# Altium PCB Serial Com Module.PcbDoc
Units mm, origin at the board's own origin, x right, y up, seen from the top; angles counter-clockwise.
Board outline 32.25 x 24.3 mm, 2 copper layers (Top Layer, Bottom Layer); 10 components, 14 nets, 45 pads, 0 vias.
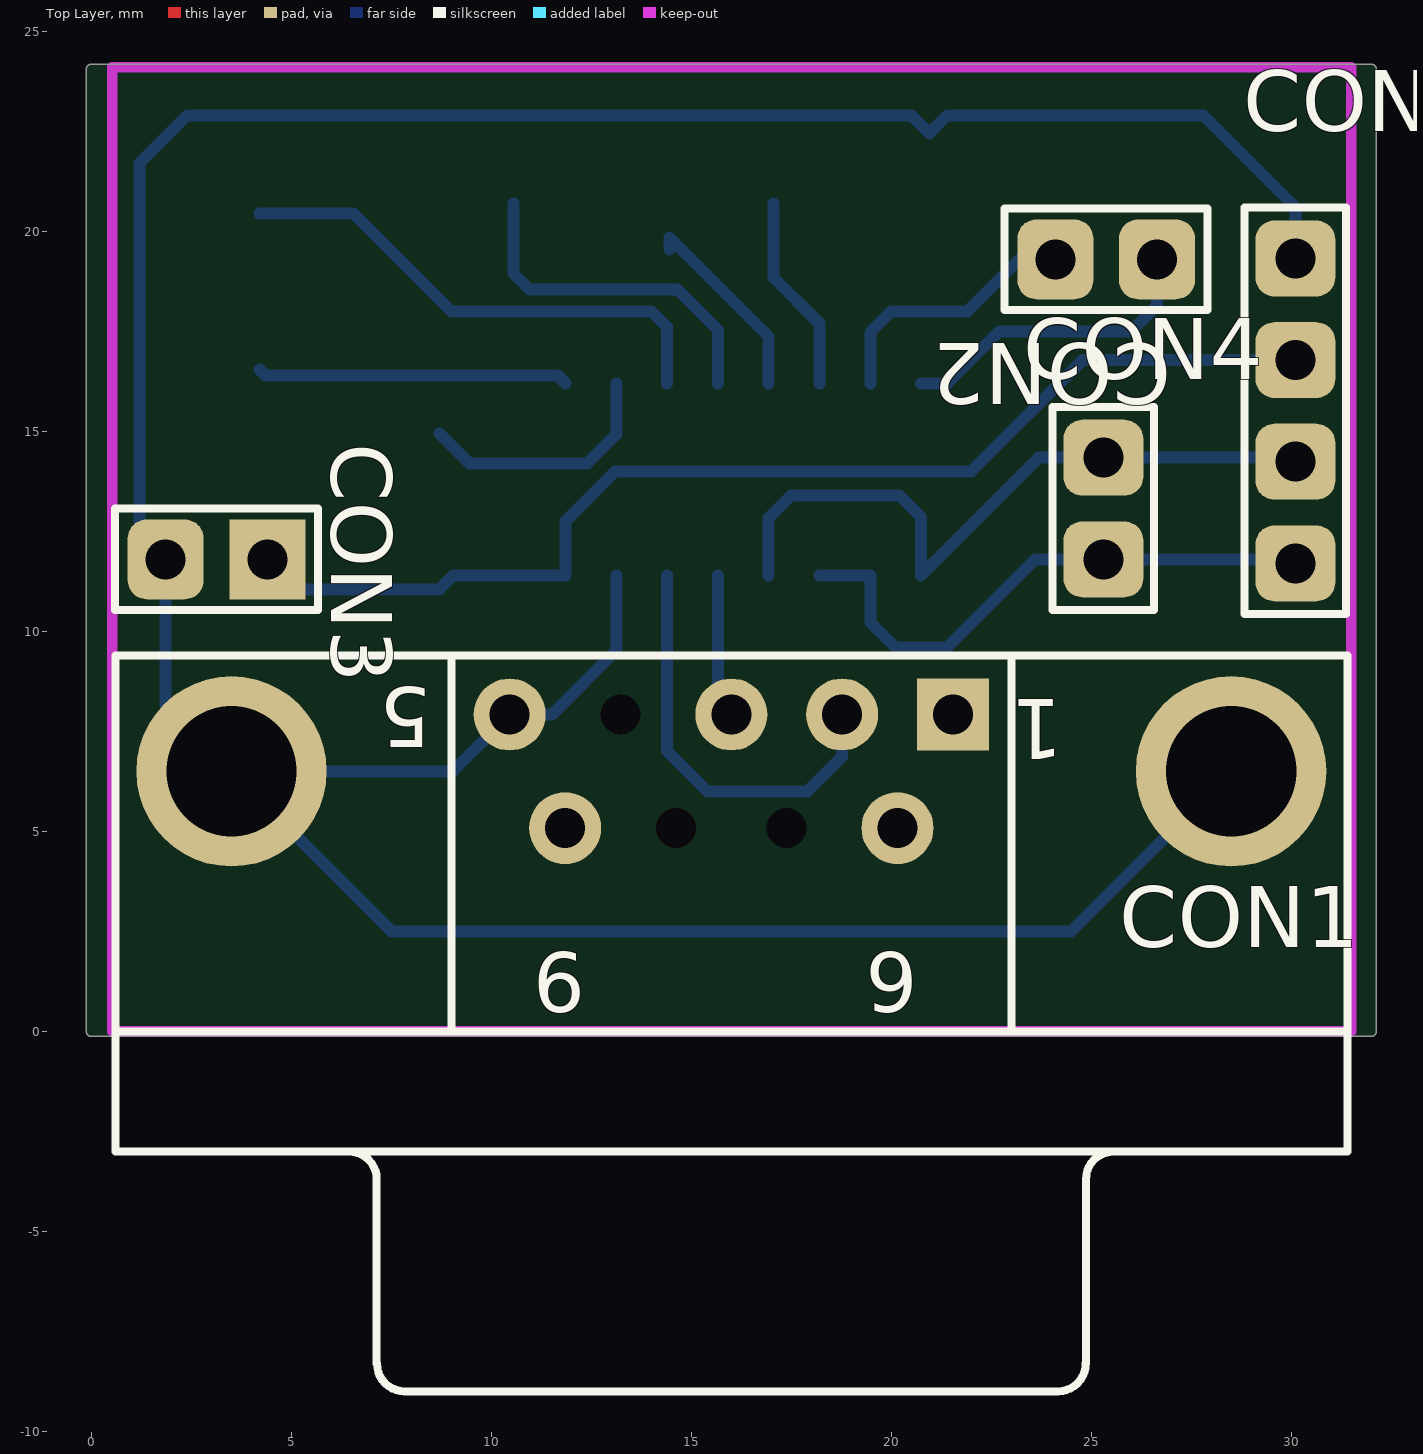
[diagram p0: Top Layer view]
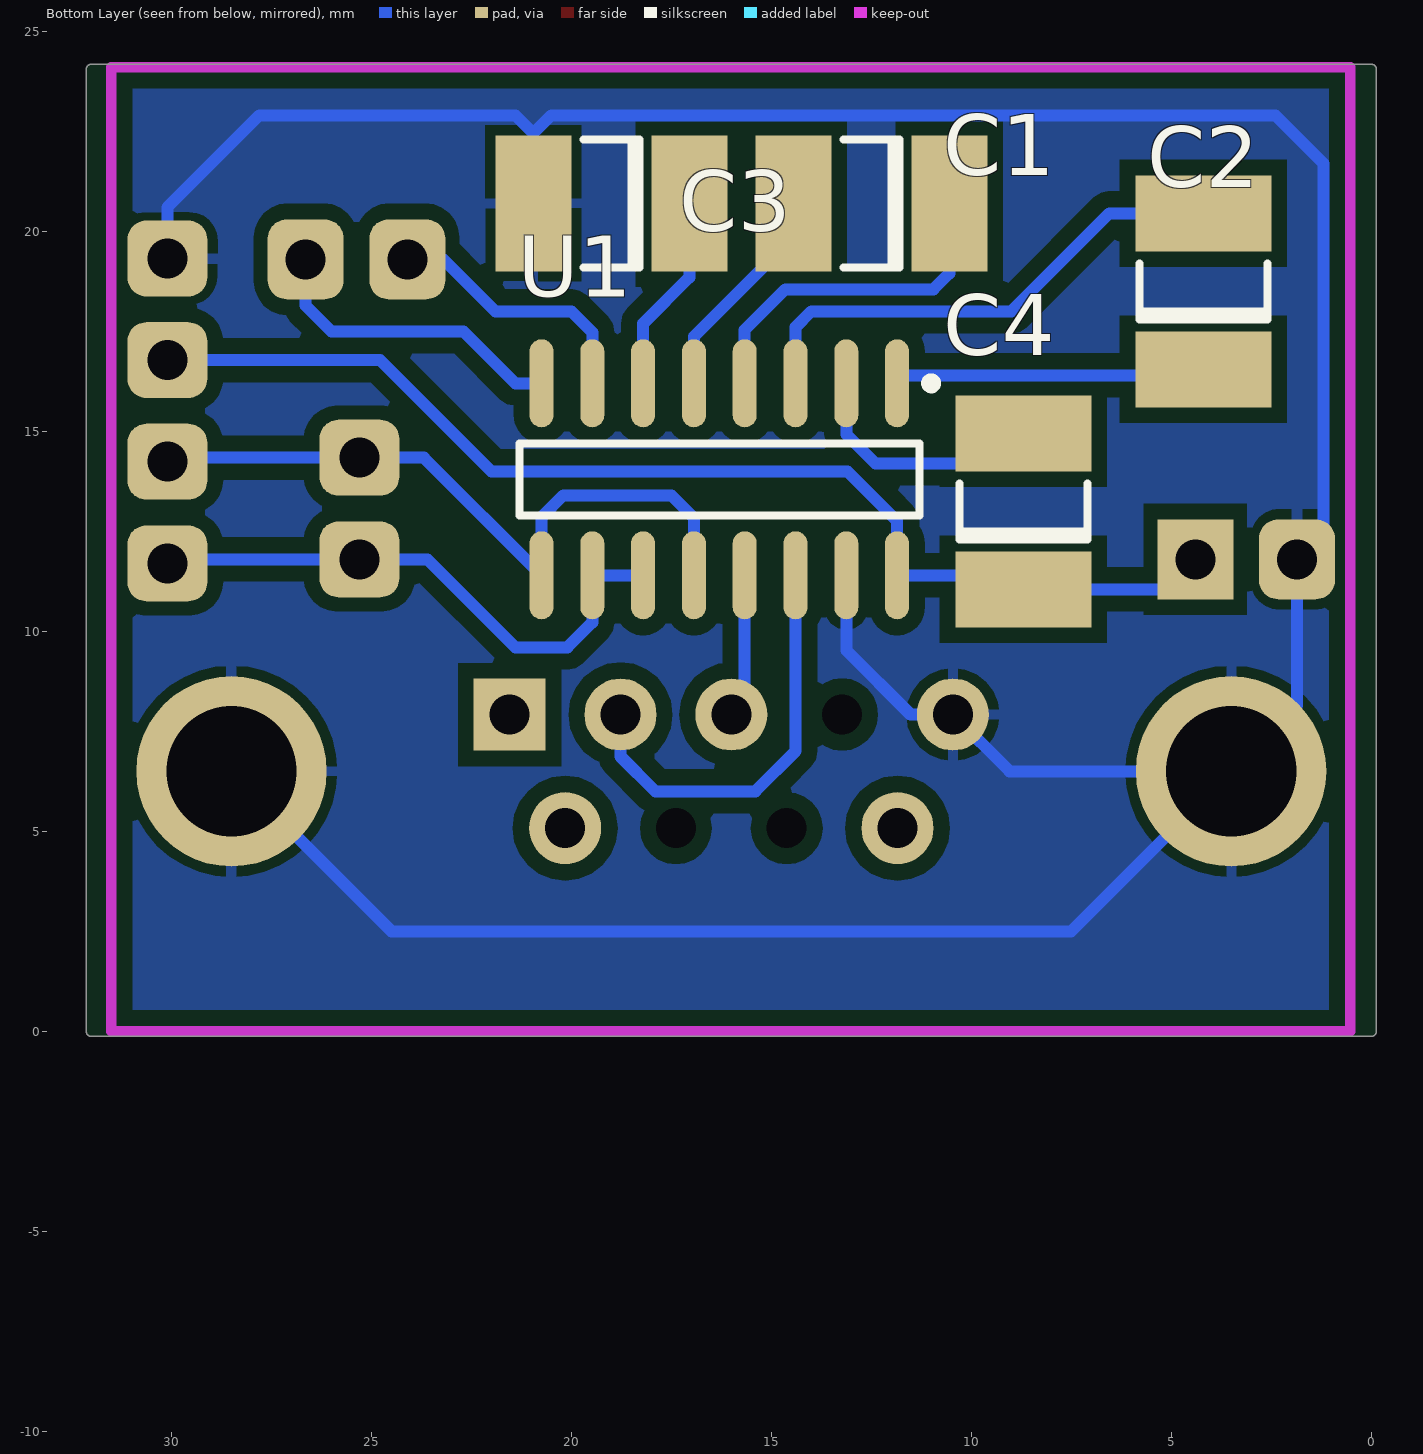
[diagram p1: Bottom Layer view, seen from below]

## Layer stack, top to bottom
Top Layer: signal copper 0.0356
Dielectric: dielectric 0.32, FR-4, Dk 4.8
Bottom Layer: signal copper 0.0356

## Board outline
-0.127,0 ccw(c0,0) 0,-0.127 32,-0.127 ccw(c32,0) 32.127,0 32.127,24.05 ccw(c32,24.05) 32,24.177 0,24.177 ccw(c0,24.05) -0.127,24.05

## Design rules (kind name [scope] priority, off if disabled: settings)
Clearance [All] p1: gap=0.25
PolygonConnect [All] p1: connectstyle=Relief reliefconductorwidth=0.254 reliefentries=4 polygonreliefangle="90 Angle" airgapwidth=0.254
RoutingVias [All] p1: holewidth=0.711 width=1.27 viastyle="Through Hole" minholewidth=0.711 minwidth=1.27 maxholewidth=0.711 maxwidth=1.27
SolderMaskExpansion [All] p1: expansion=0.102
Width [All] p1: maxlimit=5 minlimit=0.3 preferedwidth=0.3 minimp=50.000000 maximp=50.000000 favimp=50.000000
28 further rules are at their usual default settings.

## Components (designator, comment, footprint, x,y, rotation, side; value= is the part's Value field where it differs from the comment)
C1 "Cap" 4532[1812] 12.5,20.7 r0 bottom
C2 "Cap" 4532[1812] 4.2,18.5 r90 bottom
C3 "Cap" 4532[1812] 19,20.7 r0 bottom
C4 "Cap" 4532[1812] 8.7,13 r90 bottom
CON1 "D Connector 9" DSUB1.385-2H9 16,-3 r180 top
CON2 "Header 2" HDR1X2#1 24.1,19.3 r0 top
CON3 "Header 2" HDR1X2#2 4.4,11.8 r180 top
CON4 "Header 2" HDR1X2#1 25.3,11.8 r90 top
CON5 "Header 4" HDR1X4 30.1,11.7 r90 top
U1 "MAX3232CSE" NSO16_N 16.3,13.8 r270 bottom

## Footprints (in the part's own frame and the unit in brackets; to place one, negate y for a bottom-side part, rotate by r counter-clockwise, add the part's x,y. Pads: shape width x height; smd on the part's side, far side on the other; paste and mask are expansions set on the pad)
4532[1812] [mm] "Chip Capacitor; Body 4.5 x 3.2 mm (LxW typ)"
  rect 1.9x3.4 smd: 1(-1.95,0) 2(1.95,0)
  silkscreen extent -0.7,-1.6 0.7,1.6
DSUB1.385-2H9 [mm] "Connector; D Subminiature; 9 Position; Right Angle; Pitch 1.385 mm"
  rect 1.8x1.8 hole 1: 1(-5.54,-10.92)
  round 1.8 hole 1: 2(-2.77,-10.92) 3(0,-10.92) 5(5.54,-10.92) 6(-4.155,-8.08) 9(4.155,-8.08)
  round 0 hole 1: 4(2.77,-10.92) 7(-1.385,-8.08) 8(1.385,-8.08)
  round 4.76 hole 3.26: 10(-12.495,-9.5) 11(12.495,-9.5)
  silkscreen extent -15.4,-12.4 15.4,6
HDR1X2#1 [mm] "Connector; Header; 2 Position"
  rrect50% 1.9x2 hole 1: 1(0,0) 2(2.54,0)
  silkscreen extent -1.27,-1.27 3.81,1.27
HDR1X2#2 [mm] "Connector; Header; 2 Position"
  rect 1.9x2 hole 1: 1(0,0)
  rrect50% 1.9x2 hole 1: 2(2.54,0)
  silkscreen extent -1.27,-1.27 3.81,1.27
HDR1X4 [mm] "Connector; Header; 4 Position"
  rrect50% 1.9x2 hole 1: 1(0,0) 2(2.54,0) 3(5.08,0) 4(7.62,0)
  silkscreen extent -1.27,-1.27 8.89,1.27
NSO16_N [mm] "SOIC, 16-Leads, Body 9.9x3.9mm, Pitch 1.27mm, IPC Medium Density"
  oval 2.2x0.6 smd: 1(-2.4,4.445) 2(-2.4,3.175) 3(-2.4,1.905) 4(-2.4,0.635) 5(-2.4,-0.635) 6(-2.4,-1.905) 7(-2.4,-3.175) 8(-2.4,-4.445) 9(2.4,-4.445) 10(2.4,-3.175) 11(2.4,-1.905) 12(2.4,-0.635) 13(2.4,0.635) 14(2.4,1.905) 15(2.4,3.175) 16(2.4,4.445)
  silkscreen extent -2.52,-5 0.9,5.42, body extent -2,-5 2,5, height 1.75

## Part data
C1 C2 C3 C4: "Capacitor"
CON1: "Receptacle Assembly, 9 Position, Right Angle"
CON2 CON3 CON4: "Header, 2-Pin"
CON5: "Header, 4-Pin"
U1: "3.0V TO 5.5V, Low-Power, up to 1Mbps, True RS-232 Transceiver Using Four 0.1µF External Capacitor"

## Nets (pads, with @x,y where several pads share a name; then routed paths per layer and width w, separated by ;. In a path a pad name is that pad's centre, name@x,y a point inside that pad or via, vN(x,y) a via of type N, cw(c..) or ccw(c..) an arc to the next point about the centre after c; other vN are vias at no path point)
GND: C3.2 CON1.5 CON1.10 CON1.11 CON3.2 CON5.4 U1.15 | length 89.2
  Bottom Layer w0.3: U1.15 13.125,9.525 11.52,7.92 CON1.5 9.04,6.5 CON1.11 ; CON1.10 24.495,2.5 7.505,2.5 CON1.11 ; CON5.4 30.1,20.6 27.8,22.9 21.4,22.9 20.95,22.45 20.5,22.9 2.4,22.9 1.2,21.7 1.2,12.46 CON3.2 1.86,8.145 CON1.11
NetC1_1: C1.1 U1.4 | length 8.8
  Bottom Layer w0.3: C1.1 10.55,18.95 10.95,18.55 14.65,18.55 15.665,17.535 U1.4
NetC1_2: C1.2 U1.5 | length 5
  Bottom Layer w0.3: C1.2@14.45,19.55 14.45,19.85 16.935,17.365 U1.5
NetC2_1: C2.1 U1.1 | length 7.8
  Bottom Layer w0.3: C2.1 4.35,16.4 11.655,16.4 U1.1
NetC2_2: C2.2 U1.3 | length 12.8
  Bottom Layer w0.3: C2.2 6.55,20.45 9,18 14,18 14.395,17.605 U1.3
NetC3_1: C3.1 U1.6 | length 5
  Bottom Layer w0.3: C3.1 17.05,18.85 18.205,17.695 U1.6
NetC4_2: C4.2 U1.2 | length 6.3
  Bottom Layer w0.3: C4.2 9.45,14.2 12.4,14.2 13.125,14.925 U1.2
NetCON1_2: CON1.2 U1.14 | length 10.6
  Bottom Layer w0.3: U1.14 14.395,7.005 15.4,6 17.9,6 18.77,6.87 CON1.2
NetCON1_3: CON1.3 U1.13 | length 3.6
  Bottom Layer w0.3: U1.13 15.665,8.255 CON1.3
NetCON2_1: CON2.1 U1.7 | length 6.7
  Bottom Layer w0.3: U1.7 19.475,17.475 20,18 21.9,18 23.2,19.3 CON2.1
NetCON2_2: CON2.2 U1.8 | length 7.9
  Bottom Layer w0.3: U1.8 21.4,16.2 22.7,17.5 26,17.5 26.64,18.14 CON2.2
NetCON4_1: CON4.1 CON5.1 U1.10 U1.11 | length 14.1
  Bottom Layer w0.3: U1.11 U1.10 19.475,10.225 20.1,9.6 21.4,9.6 23.6,11.8 CON4.1 CON5.1@30,11.8
NetCON4_2: CON4.2 CON5.2 U1.9 U1.12 | length 17.8
  Bottom Layer w0.3: U1.12 16.935,12.835 17.5,13.4 20.2,13.4 20.745,12.855 U1.9 23.685,14.34 CON4.2 30,14.34 CON5.2
VCC: C4.1 CON3.1 CON5.3 U1.16 | length 29.2
  Bottom Layer w0.3: CON3.1 5.15,11.05 C4.1 9.05,11.4 U1.16 11.855,12.755 13.1,14 22,14 24.78,16.78 CON5.3
pads on no net: CON1.1 CON1.4 CON1.6 CON1.7 CON1.8 CON1.9

## Polygon pours and split planes (outlines as drawn)
GND on Bottom Layer "Bottom Layer-No Net" (solid, pour order 3): 0.525,24.1 31.5,24.1 31.5,0 0.525,0

## Keep-outs
Keep-Out Layer:
  lines w0.254: 0.525,0 31.5,0 31.5,24.1 0.525,24.1 0.525,0

## Dimensions
31.5,24.1 to 31.5,0 on Top Overlay
31.5,0 to 0.525,0 on Top Overlay

## Text inside footprints (layer, text, board x,y; h text height)
CON1: Top Overlay "6" at 20.655,1.975 h1.5 r180; Top Overlay "9" at 12.345,1.975 h1.5 r180; Top Overlay "5" at 8.5,8.6 h1.5 r180; Top Overlay "1" at 24.3,8.3 h1.5 r180